# Altium PCB L293D.PcbDoc
Units mil, origin at the board's own origin, x right, y up, seen from the top; angles counter-clockwise.
Board outline 1225 x 1080 mil, 2 copper layers (Top Layer, Bottom Layer); 5 components, 7 nets, 24 pads, 0 vias.
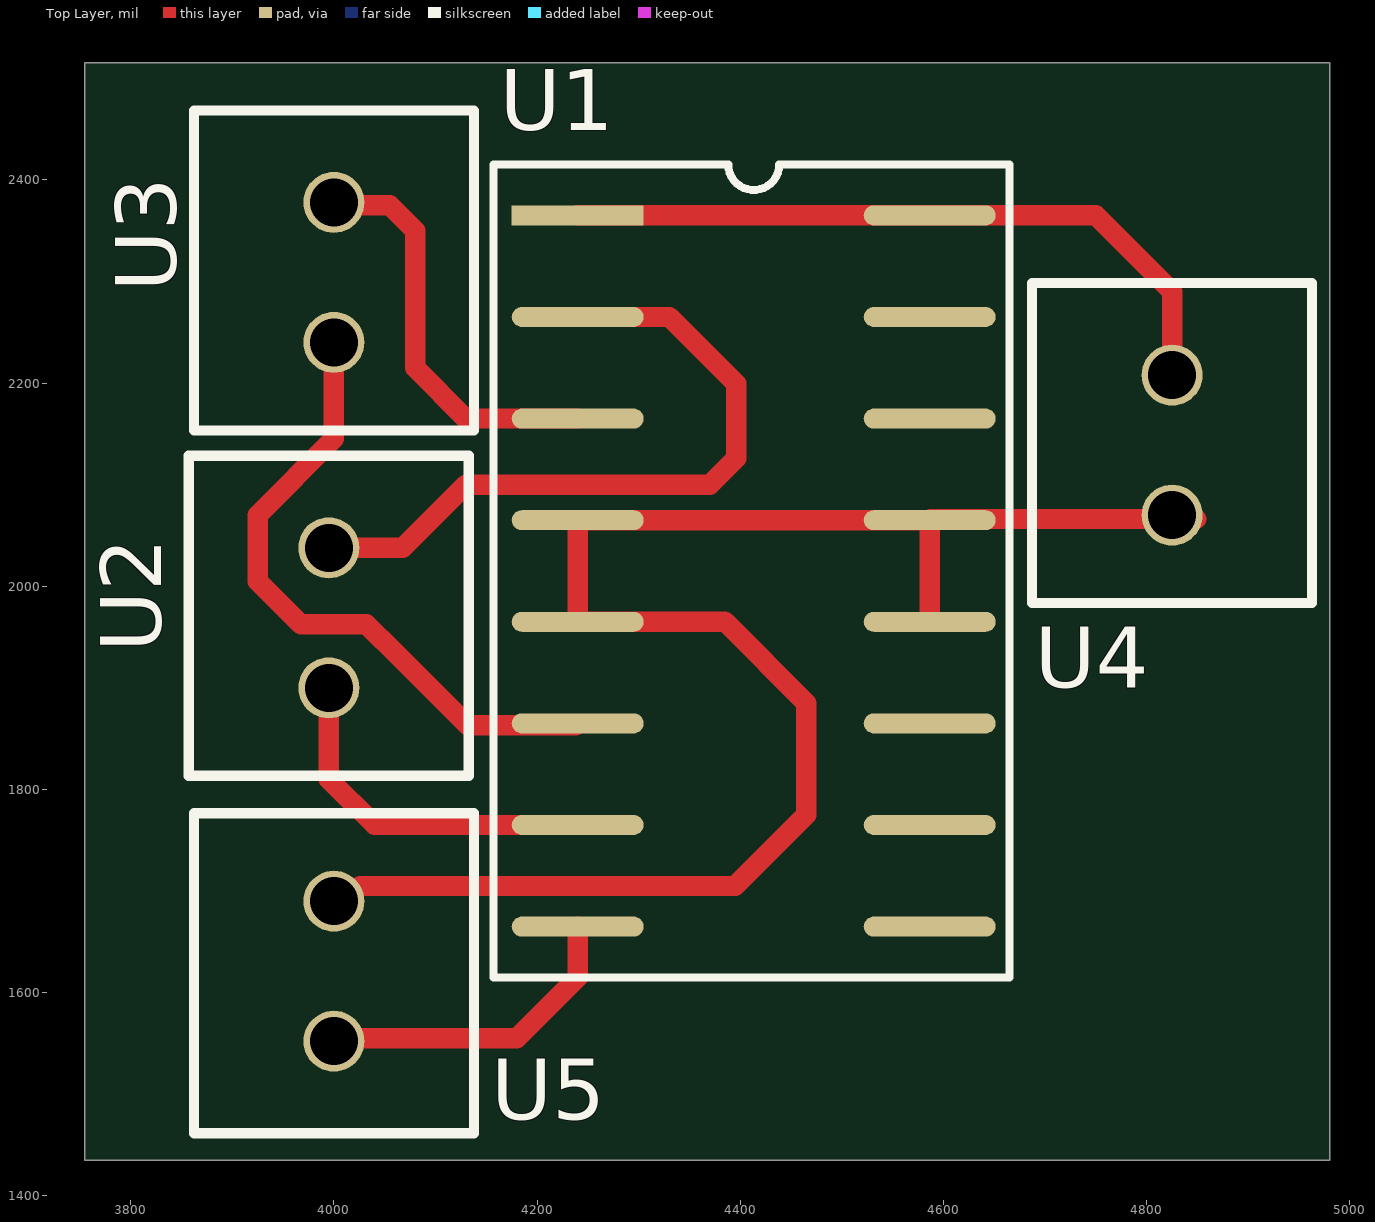
[diagram p0: Top Layer view]
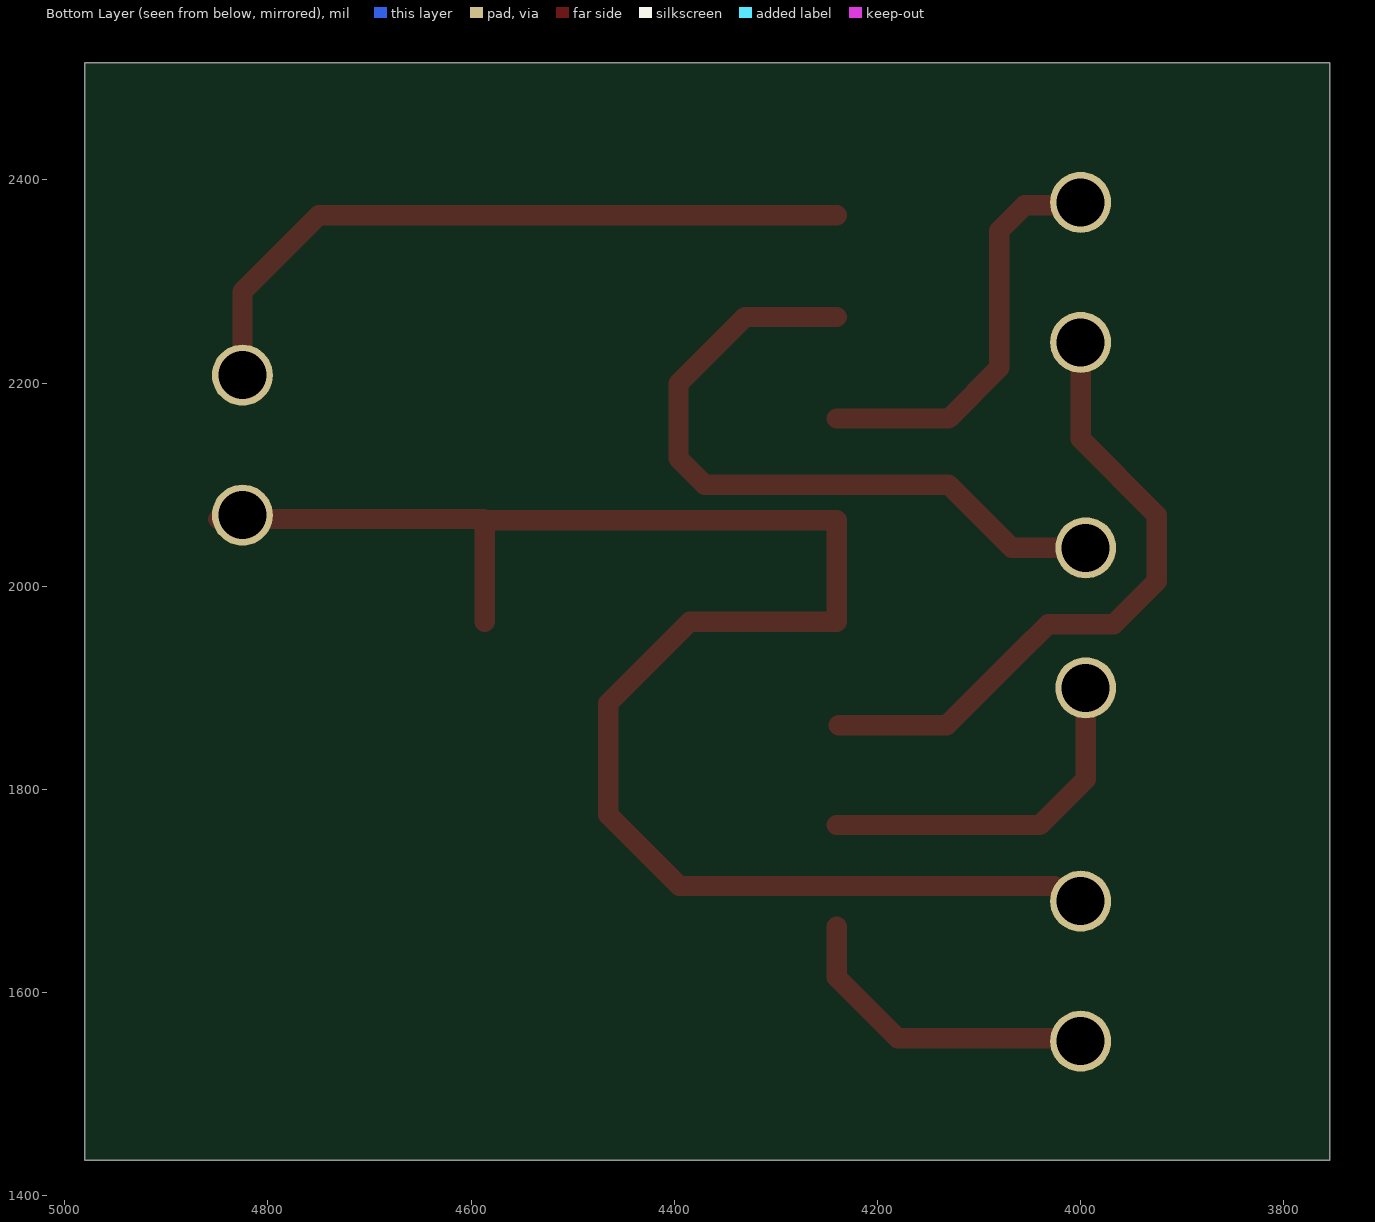
[diagram p1: Bottom Layer view, seen from below]
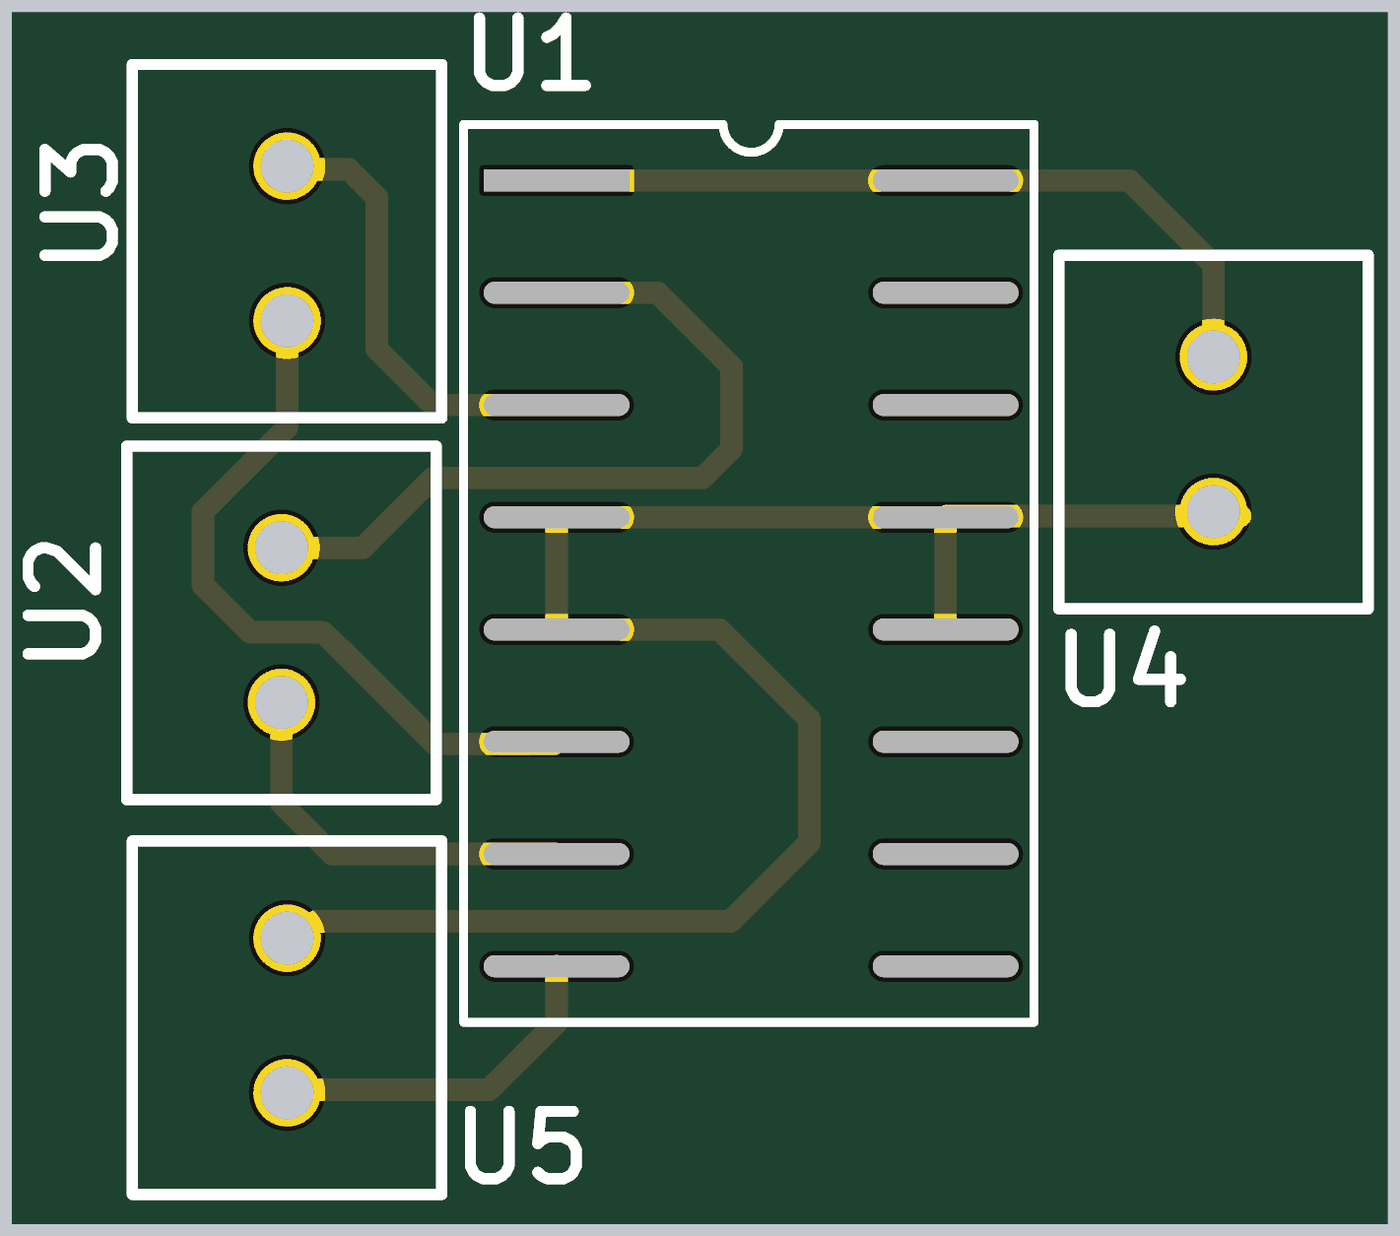
[diagram p2: 3D render of the assembled board from above, using the file's embedded part models]

## Layer stack, top to bottom
Top Solder: solder mask 0.4, Solder Resist, Dk 3.5
Top Layer: signal copper 1.4
Dielectric 1: dielectric 12.6, FR-4, Dk 4.8
Bottom Layer: signal copper 1.4
Bottom Solder: solder mask 0.4, Solder Resist, Dk 3.5

## Board outline
3755,1435 4980,1435 4980,2515 3755,2515

## Design rules (kind name [scope] priority, off if disabled: settings)
Clearance [All] p1: gap=10 ignorepadtopadclearanceinfootprint=FALSE except(0: Arc-Hole Track-Hole SMDPad-Hole THPad-Hole Via-Hole Fill-Hole Poly-Hole Region-Hole Text-Hole)
PolygonConnect [All] p1: connectstyle=Relief reliefconductorwidth=10 reliefentries=4 polygonreliefangle="90 Angle" airgapwidth=10
RoutingVias [All] p1: holewidth=28 width=50 viastyle="Through Hole" minholewidth=28 minwidth=50 maxholewidth=28 maxwidth=50
SolderMaskExpansion [All] p1: expansion=4 istentingtop=FALSE
Width [All] p1: maxlimit=50 minlimit=10 preferedwidth=10 minimp=50.000000 maximp=50.000000 favimp=50.000000
30 further rules are at their usual default settings.

## Components (designator, comment, footprint, x,y, rotation, side; value= is the part's Value field where it differs from the comment)
U1 "L293D" "L293D - duplicate" 4240,2365 r0 top
U2 "Input(1&2)" Terminal_Block 3963.5,2088.98 r90 top
U3 "DC_Motor(out)" Terminal_Block 3968.5,2428.98 r90 top
U4 "Terminal_Block" Terminal_Block 4793.5,2258.98 r90 top
U5 "Terminal_Block" Terminal_Block 4031.5,1501.02 r270 top

## Footprints (in the part's own frame and the unit in brackets; to place one, negate y for a bottom-side part, rotate by r counter-clockwise, add the part's x,y. Pads: shape width x height; smd on the part's side, far side on the other; paste and mask are expansions set on the pad)
"L293D - duplicate" [mm]
  rect 3.3x0.5 smd: 1(0,0)
  oval 3.3x0.5 smd: 2(0,-2.54) 3(0,-5.08) 4(0,-7.62) 5(0,-10.16) 6(0,-12.7) 7(0,-15.24) 8(0,-17.78) 9(8.8,-17.78) 10(8.8,-15.24) 11(8.8,-12.7) 12(8.8,-10.16) 13(8.8,-7.62) 14(8.8,-5.08) 15(8.8,-2.54) 16(8.8,0)
  silkscreen extent -2.1,-19.05 10.8,1.27
Terminal_Block [mm]
  round 1.524 hole 1.2: 1(-1.3,-0.8) 2(-4.8,-0.8)
  silkscreen extent -7,-4.3 1,2.7, body extent -6.9,-4.2 0.9,2.6, height 9.1

## Part data
U1: library part L293D_IC, Manufacturer="Texas Instrument", Supplier=LCSC
U2 U3: library part Terminal_Block

## Nets (pads, with @x,y where several pads share a name; then routed paths per layer and width w, separated by ;. In a path a pad name is that pad's centre, name@x,y a point inside that pad or via, vN(x,y) a via of type N, cw(c..) or ccw(c..) an arc to the next point about the centre after c; other vN are vias at no path point)
+5: U1.1 U1.16 U4.1 | length 698.3
  Top Layer w20: U1.1 U1.16 4750,2365 4825,2290 U4.1
+7: U1.8 U5.1 | length 316
  Top Layer w10: U5.1 U5.1@4002.8,1555
  Top Layer w20: U5.1@4002.8,1555 4180,1555 4240,1615 U1.8
GND: U1.4 U1.5 U1.12 U1.13 U4.2 U5.2 | length 1679.3
  Top Layer w10: U1.13 U1.13@4587.56,2066.1 ; U4.2@4848.9,2066.1 U4.2@4850,2067.2
  Top Layer w20: U5.2 4010.82,1690 4025.82,1705 4395,1705 4465,1775 4465,1885 4385,1965 U1.5 U1.4 U1.13 U1.12 ; U1.13@4587.56,2066.1 U4.2@4848.9,2066.1
NetU1_2: U1.2 U2.1 | length 693.8
  Top Layer w20: U2.1 4067.8,2037.8 4130,2100 4370,2100 4395.86,2125.86 4395.86,2199.14 4330,2265 U1.2
NetU1_3: U1.3 U3.1 | length 407.2
  Top Layer w10: U3.1 U3.1@4002.8,2375
  Top Layer w20: U3.1@4002.8,2375 4055,2375 4080,2350 4080,2215 4130,2165 U1.3
NetU1_6: U1.6 U3.2 | length 640.6
  Top Layer w10: U1.6@4238.15,1863.15 U1.6
  Top Layer w20: U3.2 4000,2145 3925,2070 3925,2005 3967.57,1962.43 4031.96,1962.43 4047.18,1947.2 4047.8,1947.2 4131.85,1863.15 U1.6@4238.15,1863.15
NetU1_7: U1.7 U2.2 | length 353.6
  Top Layer w20: U2.2 3995,1810 4040,1765 U1.7
pads on no net: U1.9 U1.10 U1.11 U1.14 U1.15